# EAGLE board Pinscape Pico Expansion Board - DIY Friendly Main - SMD Sockets (EAGLE 7.7.0)
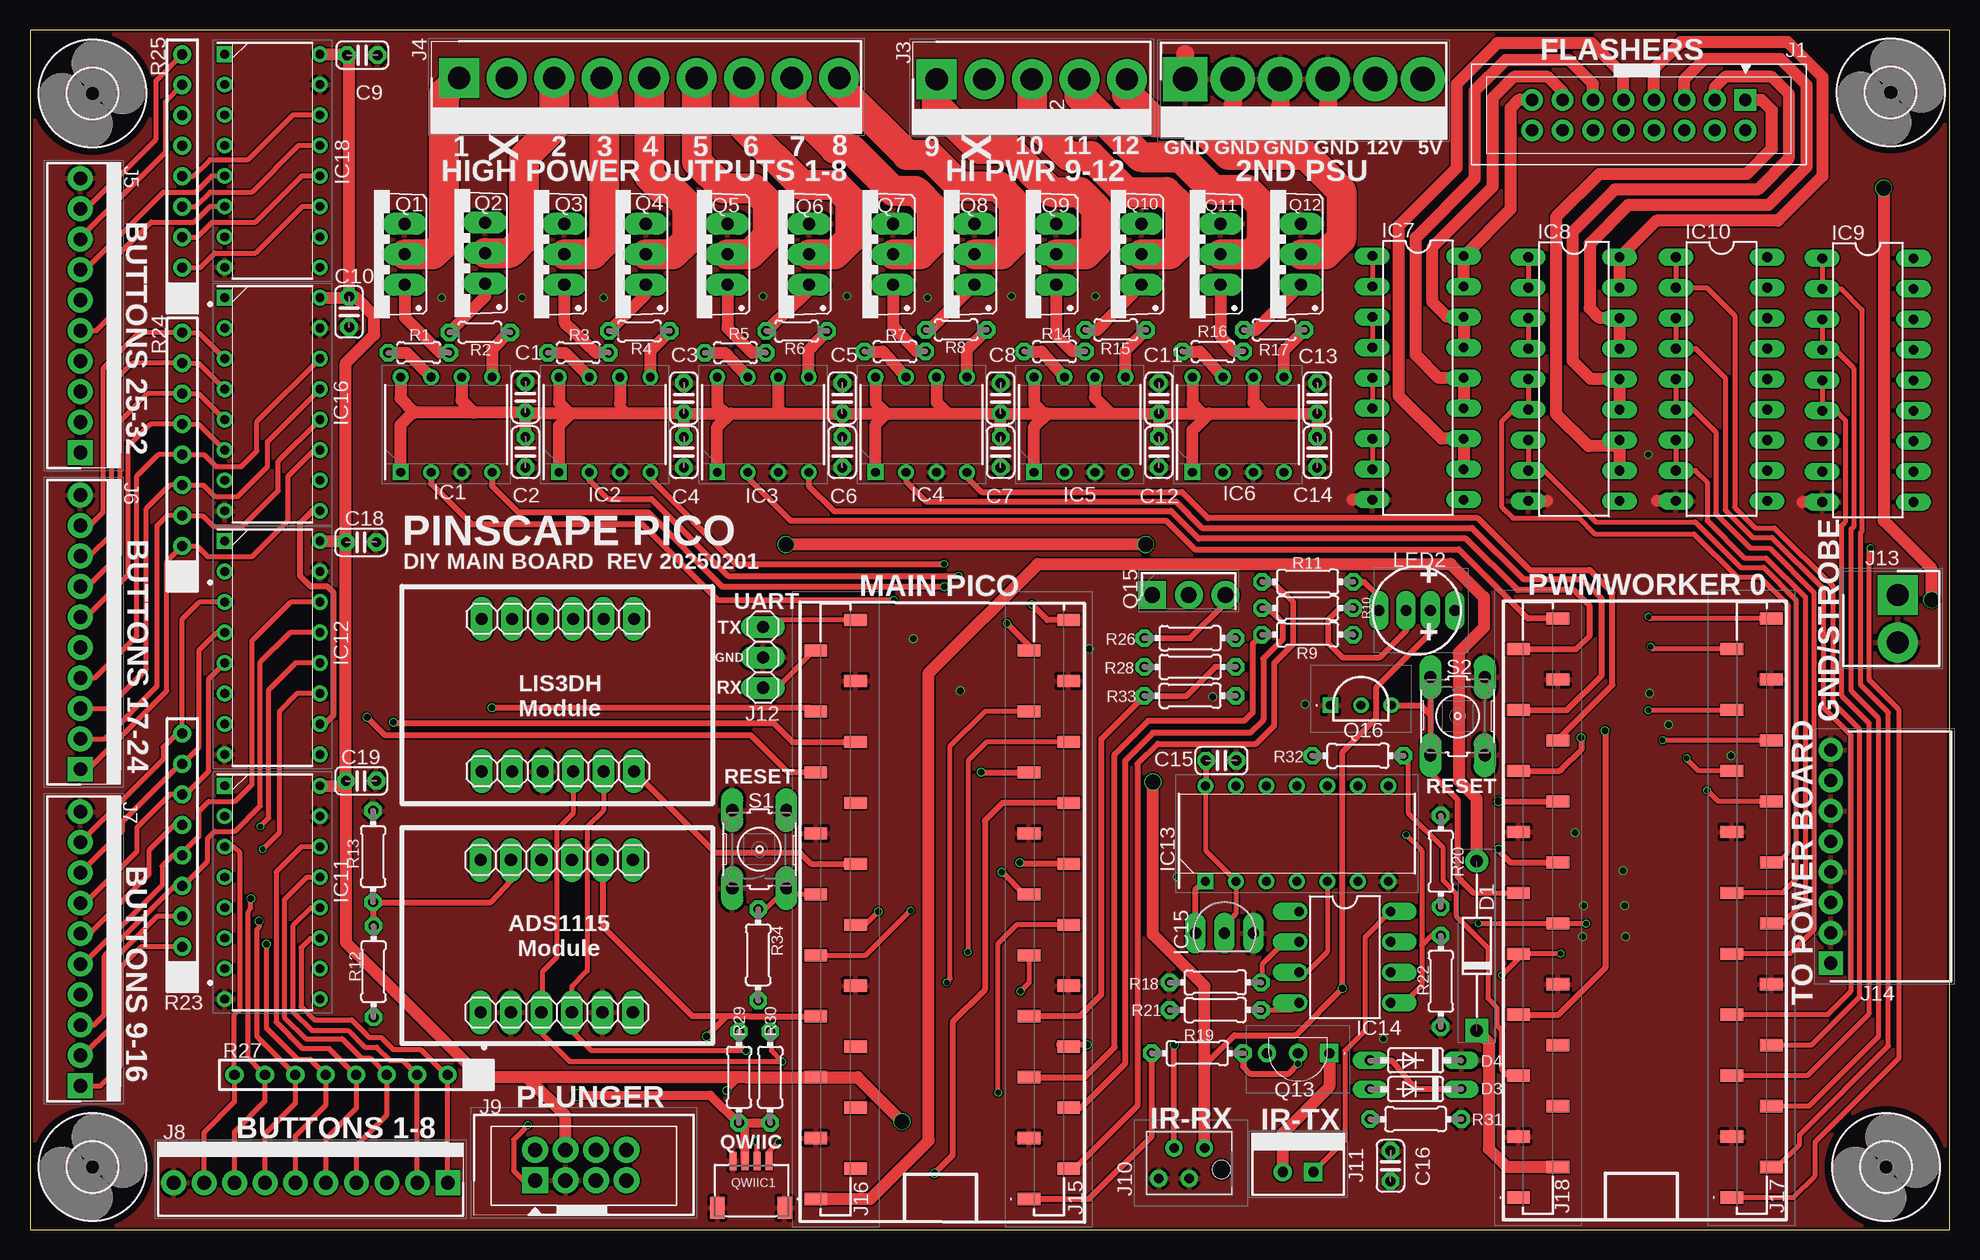
[diagram p0: board, top side]
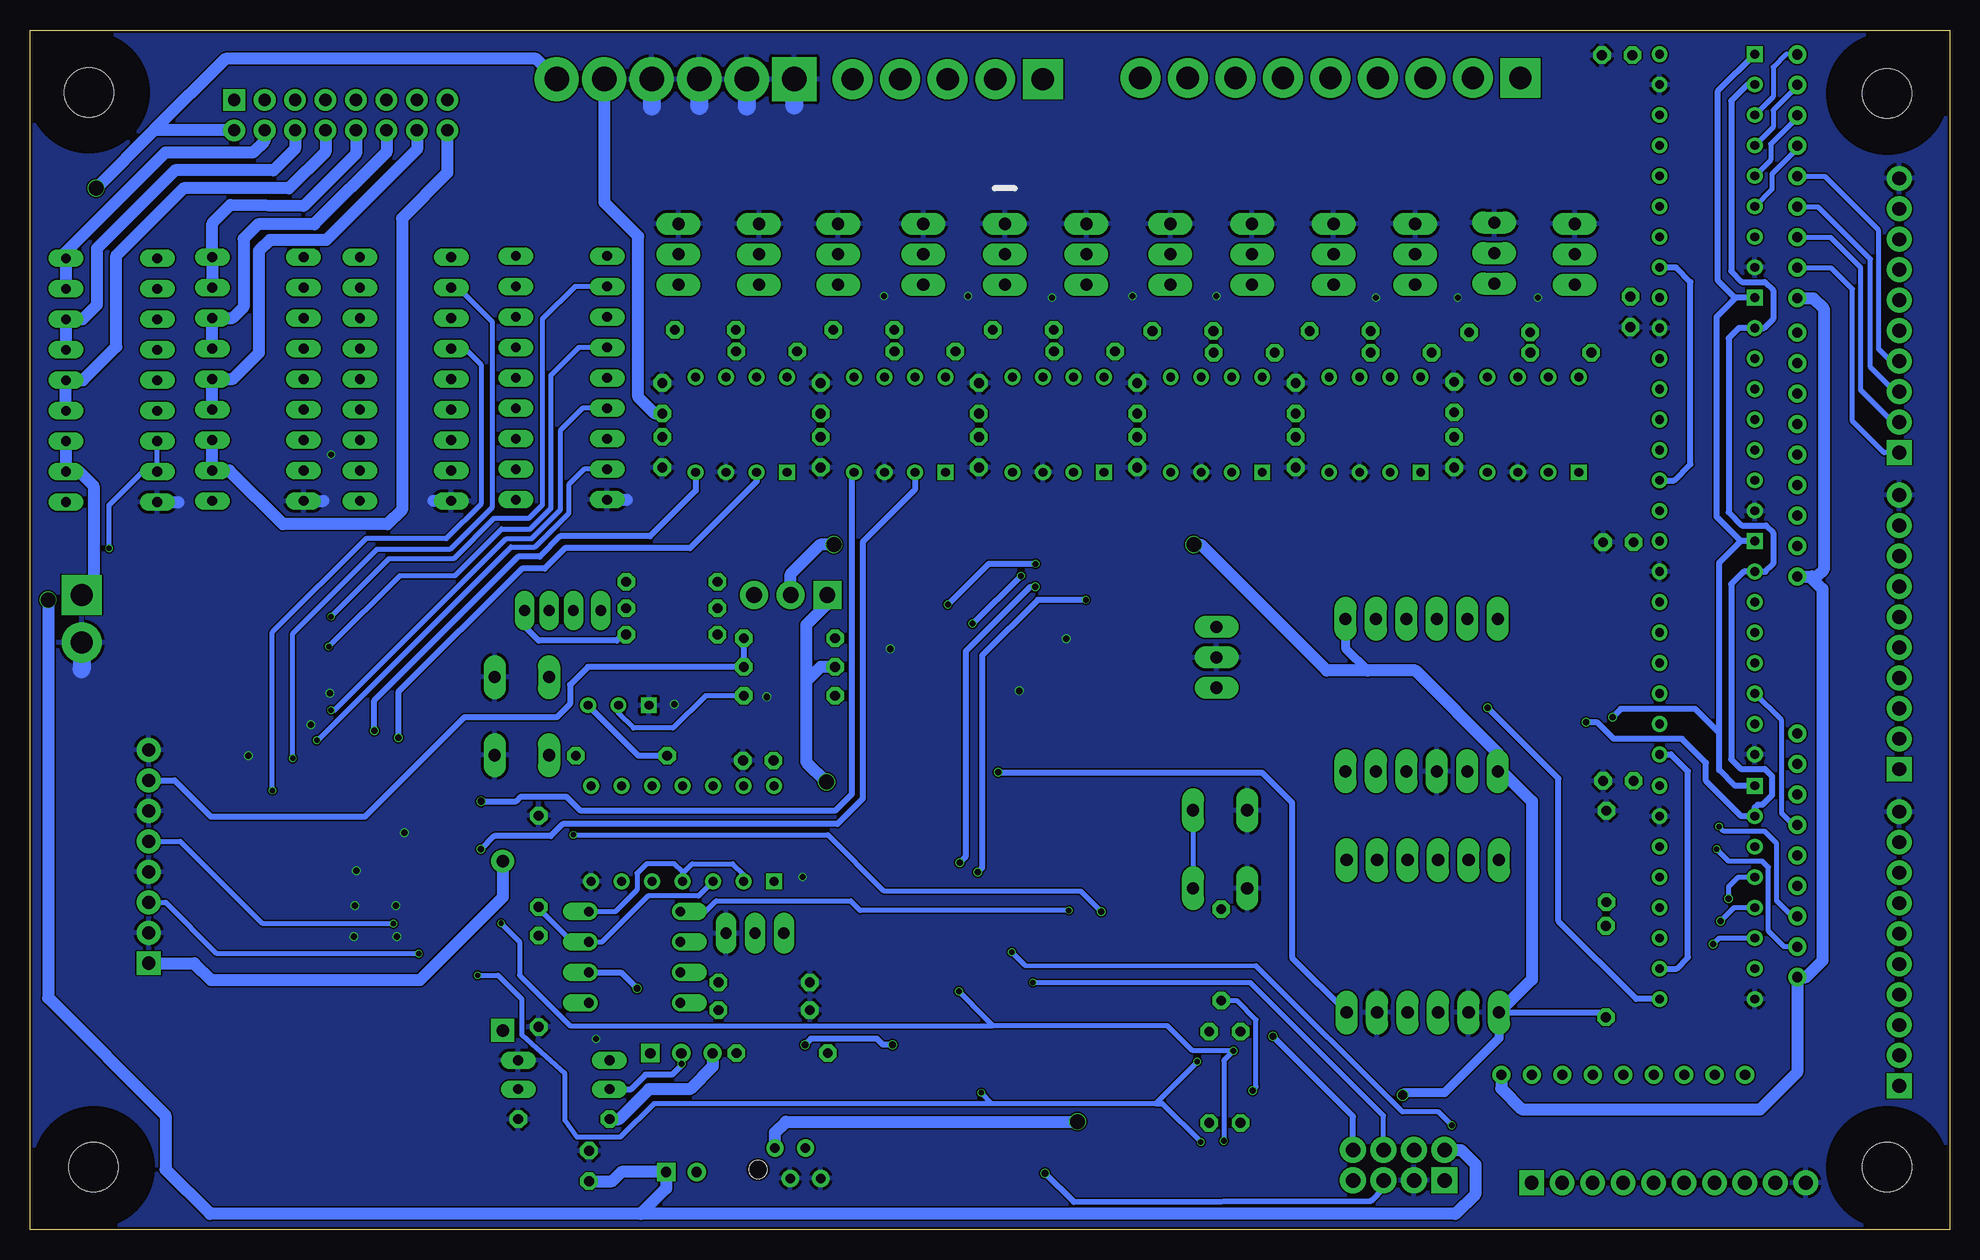
[diagram p1: board, bottom side, seen from below]

Size 160 x 100 mm. Coordinates in mm from the lower left corner, seen from the top.
Outline: 0,0 160,0 160,100 0,100 0,0
Copper layers (1*16): Top 0.035mm / dielectric 1.6mm / Bottom 0.035mm
Design rules "jlcpcb-2layers": minimum track width 5mil, minimum drill 0.3mm, track to track 5mil, track to pad 5mil, pad to pad 5mil, via to via 5mil, smd to smd 5mil, copper to edge 0.2mm, drill to drill 6mil, minimum pad ring 10mil, minimum via ring 3mil, stop-mask expansion 4mil, vias tented up to drill 0mil, thermal gap 10mil
Net classes: 1 highpower: width 0.305 mm, drill 0.483 mm

## Footprints (pad centres in the part's own frame; a part is rotated, then mirrored left to right if it is on the bottom)
C025-024X044 = drill 0.813 octagon: 1 -1.27,0; 2 1.27,0
DIOAD1408W86L464D236 = drill 1.05 pad 1.575 square: 1 0,0 | drill 1.05 pad 1.575: 2 14.1,0
DO35-7 = drill 0.813 long: A 3.81,0; C -3.81,0
DIP794W53P254L959H508Q8N = drill 0.73 pad 1.13 square: 1 -3.97,3.81 | drill 0.73 pad 1.13: 2 -3.97,1.27; 3 -3.97,-1.27; 4 -3.97,-3.81; 5 3.97,-3.81; 6 3.97,-1.27; 7 3.97,1.27; 8 3.97,3.81
DIL18 = drill 0.813 long: 1 -10.16,-3.81; 2 -7.62,-3.81; 3 -5.08,-3.81; 4 -2.54,-3.81; 5 0,-3.81; 6 2.54,-3.81; 7 5.08,-3.81; 8 7.62,-3.81; 9 10.16,-3.81; 10 10.16,3.81; 11 7.62,3.81; 12 5.08,3.81; 13 2.54,3.81; 14 0,3.81; 15 -2.54,3.81; 16 -5.08,3.81; 17 -7.62,3.81; 18 -10.16,3.81
DIP794W53P254L1930H508Q16N = drill 0.73 pad 1.13 square: 1 -3.97,8.89 | drill 0.73 pad 1.13: 2 -3.97,6.35; 3 -3.97,3.81; 4 -3.97,1.27; 5 -3.97,-1.27; 6 -3.97,-3.81; 7 -3.97,-6.35; 8 -3.97,-8.89; 9 3.97,-8.89; 10 3.97,-6.35; 11 3.97,-3.81; 12 3.97,-1.27; 13 3.97,1.27; 14 3.97,3.81; 15 3.97,6.35; 16 3.97,8.89
DIP794W53P254L1930H508Q14N = drill 0.73 pad 1.13 square: 1 -3.97,7.62 | drill 0.73 pad 1.13: 2 -3.97,5.08; 3 -3.97,2.54; 4 -3.97,0; 5 -3.97,-2.54; 6 -3.97,-5.08; 7 -3.97,-7.62; 8 3.97,-7.62; 9 3.97,-5.08; 10 3.97,-2.54; 11 3.97,0; 12 3.97,2.54; 13 3.97,5.08; 14 3.97,7.62
DIL08 = drill 0.813 offset: 1 -3.81,-3.81; 2 -1.27,-3.81; 3 1.27,-3.81; 4 3.81,-3.81; 5 3.81,3.81; 6 1.27,3.81; 7 -1.27,3.81; 8 -3.81,3.81
TO-92_(TO-226) = drill 0.94 pad 1.118 long: 1 1.143,0; 2 -1.27,0; 3 -3.683,0
3M-30316-6002HB = drill 1.01 pad 1.51 square: 1 -8.89,-1.27 | drill 1.01 pad 1.51: 2 -8.89,1.27; 3 -6.35,-1.27; 4 -6.35,1.27; 5 -3.81,-1.27; 6 -3.81,1.27; 7 -1.27,-1.27; 8 -1.27,1.27; 9 1.27,-1.27; 10 1.27,1.27; 11 3.81,-1.27; 12 3.81,1.27; 13 6.35,-1.27; 14 6.35,1.27; 15 8.89,-1.27; 16 8.89,1.27
SHDR6W183P0X396_1X6_2377X762X1 = drill 2.05 pad 3.075 square: 1 0,0 | drill 2.05 pad 3.075: 2 3.96,0; 3 7.92,0; 4 11.88,0; 5 15.84,0; 6 19.8,0
HDRV5W117P0X396_1X5_1981X762X1 = drill 1.85 pad 2.775 square: 1 7.92,0 | drill 1.85 pad 2.775: 2 3.958,0; 3 -0.004,0; 4 -3.966,0; 5 -7.928,0
SHDR9W117P0X396_1X9_3566X762X1 = drill 1.85 pad 2.775 square: 1 15.84,0 | drill 1.85 pad 2.775: 2 11.878,0; 3 7.916,0; 4 3.954,0; 5 -0.008,0; 6 -3.97,0; 7 -7.932,0; 8 -11.894,0; 9 -15.856,0
SHDR10W66P0X254_1X10_2540X572X = drill 1.15 pad 1.725 square: 1 11.43,0 | drill 1.15 pad 1.725: 2 8.89,0; 3 6.35,0; 4 3.81,0; 5 1.27,0; 6 -1.27,0; 7 -3.81,0; 8 -6.35,0; 9 -8.89,0; 10 -11.43,0
SHDR8W69P254_2X4_1780X878X955P = drill 1.2 pad 1.8 square: 1 0,0 | drill 1.2 pad 1.8: 2 0,2.54; 3 2.54,0; 4 2.54,2.54; 5 5.08,0; 6 5.08,2.54; 7 7.62,0; 8 7.62,2.54
2150794 = drill 0.8 pad 1.3: 1 0,0; 2 -1.27,-2.54; 3 -2.54,0; 4 -3.81,-2.54 | hole 1.5: 1.4,-1.8
HDRV2W66P0X254_1X2_762X572X100 = drill 0.85 pad 1.275 square: 1 1.27,0 | drill 0.85 pad 1.275: 2 -1.27,0
1X03 = drill 1.016 long: 1 -2.54,0; 2 0,0; 3 2.54,0
SHDR2W117P0X396_1X2_792X762X11 = drill 1.85 pad 2.775 square: 1 0,0 | drill 1.85 pad 2.775: 2 3.962,0
RHDRRA8W64P254_1X8_2083X851X24 = drill 1.1 pad 1.65 square: 1 0,0 | drill 1.1 pad 1.65: 2 -2.54,0; 3 -5.08,0; 4 -7.62,0; 5 -10.16,0; 6 -12.7,0; 7 -15.24,0; 8 -17.78,0
M20-7862042-B = smd 1.02 x 1.9: 1 -24.13,1.65; 2 -21.59,-1.65; 3 -19.05,1.65; 4 -16.51,-1.65; 5 -13.97,1.65; 6 -11.43,-1.65; 7 -8.89,1.65; 8 -6.35,-1.65; 9 -3.81,1.65; 10 -1.27,-1.65; 11 1.27,1.65; 12 3.81,-1.65; 13 6.35,1.65; 14 8.89,-1.65; 15 11.43,1.65; 16 13.97,-1.65; 17 16.51,1.65; 18 19.05,-1.65; 19 21.59,1.65; 20 24.13,-1.65
1X06 = drill 1.016 long: 1 -6.35,0; 2 -3.81,0; 3 -1.27,0; 4 1.27,0; 5 3.81,0; 6 6.35,0
5218559F = drill 0.91 pad 1.016 long: 1 0,1.27; 2 0,-0.762; 3 0,-2.794; 4 0,-5.08
TO220BV = drill 1.016 long: 1 -2.54,-2.54; 2 0,-2.54; 3 2.54,-2.54
BC33725 = drill 0.85 pad 1.381 square: 1 0,0 | drill 0.85 pad 1.381: 2 2.6,0; 3 5.2,0
TO229P300X760X1364-3P = drill 1.3 pad 1.95 square: 1 -0.762,0 | drill 1.3 pad 1.95: 2 2.29,0; 3 5.342,0
2N2222A = drill 0.72 pad 1.234 square: 1 0,0 | drill 0.72 pad 1.234: 2 2.54,0; 3 5.08,0
JST_SH4 = smd 0.6 x 1.55: 1 -1.5,2.514; 2 -0.5,2.514; 3 0.5,2.514; 4 1.5,2.514 | smd 1.2 x 1.8: MT1 -2.8,-1.386; MT2 2.8,-1.386
0204/5 = drill 0.813 pad 1.333 octagon: 1 -2.54,0; 2 2.54,0
0204/7 = drill 0.813 octagon: 1 -3.81,0; 2 3.81,0
4609X = drill 0.84 pad 1.34: 1 -10.16,0; 2 -7.62,0; 3 -5.08,0; 4 -2.54,0; 5 0,0; 6 2.54,0; 7 5.08,0; 8 7.62,0; 9 10.16,0
B3F-10XX = drill 1.016 long: 1 -3.251,2.261; 2 3.251,2.261; 3 -3.251,-2.261; 4 3.251,-2.261
4,1 = hole 4.1: 0,0

## Placement (x,y rotation side)
C1  100nF  [C025-024X044]  41.3,69.4 270 top
C2  4.7uF  [C025-024X044]  41.3,64.8 90 top
C3  100nF  [C025-024X044]  54.5,69.3 270 top
C4  4.7uF  [C025-024X044]  54.5,64.8 90 top
C5  100nF  [C025-024X044]  67.7,69.3 270 top
C6  4.7uF  [C025-024X044]  67.7,64.8 90 top
C7  100nF  [C025-024X044]  80.9,64.8 90 top
C8  4.7uF  [C025-024X044]  80.9,69.3 270 top
C9  100nF  [C025-024X044]  27.7,97.9 180 top
C10  100nF  [C025-024X044]  26.6,76.5 90 top
C11  100nF  [C025-024X044]  94.1,69.3 270 top
C12  4.7uF  [C025-024X044]  94.1,64.8 90 top
C13  100nF  [C025-024X044]  107.3,69.3 270 top
C14  4.7uF  [C025-024X044]  107.3,64.8 90 top
C15  100nF  [C025-024X044]  99.3,39.1 0 top
C16  4.7uF  [C025-024X044]  113.4,5.3 90 top
C18  100nF  [C025-024X044]  27.6,57.3 180 top
C19  100nF  [C025-024X044]  27.6,37.4 180 top
D1  SB140-T  [DIOAD1408W86L464D236]  120.6,16.6 90 top
D3  1N4148  [DO35-7]  115.5,11.7 180 top
D4  1N4148  [DO35-7]  115.5,14.1 180 top
IC1  UCC27524P  [DIP794W53P254L959H508Q8N]  34.7,67.1 90 top
IC2  UCC27524P  [DIP794W53P254L959H508Q8N]  47.9,67.1 90 top
IC3  UCC27524P  [DIP794W53P254L959H508Q8N]  61.1,67.1 90 top
IC4  UCC27524P  [DIP794W53P254L959H508Q8N]  74.3,67.1 90 top
IC5  UCC27524P  [DIP794W53P254L959H508Q8N]  87.5,67.1 90 top
IC6  UCC27524P  [DIP794W53P254L959H508Q8N]  100.7,67.1 90 top
IC7  ULN2803A  [DIL18]  115.7,71 270 top
IC8  ULN2803A  [DIL18]  128.7,70.9 270 top
IC9  ULN2803A  [DIL18]  153.2,70.8 270 top
IC10  ULN2803A  [DIL18]  141,70.9 270 top
IC11  SN74HC165N  [DIP794W53P254L1930H508Q16N]  20.2,28.1 0 top
IC12  SN74HC165N  [DIP794W53P254L1930H508Q16N]  20.2,48.5 0 top
IC13  SN74HC74NE4  [DIP794W53P254L1930H508Q14N]  105.6,33 90 top
IC14  PC827  [DIL08]  109.6,22.7 270 top
IC15  S-80833CLY  [TO-92_(TO-226)]  98.3,24.7 180 top
IC16  SN74HC165N  [DIP794W53P254L1930H508Q16N]  20.2,68.8 0 top
IC18  SN74HC165N  [DIP794W53P254L1930H508Q16N]  20.2,89.1 0 top
J1  30316-6002HB  [3M-30316-6002HB]  134.1,92.9 180 top
J2  640445-6  [SHDR6W183P0X396_1X6_2377X762X1]  96.3,95.9 0 top
J3  640445-5  [HDRV5W117P0X396_1X5_1981X762X1]  83.5,95.9 180 top
J4  640445-9  [SHDR9W117P0X396_1X9_3566X762X1]  51.6,96 180 top
J5  1-640456-0  [SHDR10W66P0X254_1X10_2540X572X]  4.2,76.2 270 top
J6  1-640456-0  [SHDR10W66P0X254_1X10_2540X572X]  4.2,49.8 270 top
J7  1-640456-0  [SHDR10W66P0X254_1X10_2540X572X]  4.2,23.4 270 top
J8  1-640456-0  [SHDR10W66P0X254_1X10_2540X572X]  23.4,3.9 0 top
J9  30308-6002HB  [SHDR8W69P254_2X4_1780X878X955P]  42.1,4.1 0 top
J10  215079-4  [2150794]  97.9,6.8 0 top
J11  640454-2  [HDRV2W66P0X254_1X2_762X572X100]  105.7,4.8 0 top
J12  [1X03]  61.1,47.7 270 top
J13  640445-2  [SHDR2W117P0X396_1X2_792X762X11]  155.7,52.9 270 top
J14  SSQ-108-02-T-S-RA  [RHDRRA8W64P254_1X8_2083X851X24]  150.1,22.2 270 top
J15  M20-7862042B  [M20-7862042-B]  84.92,26.68 90 top
J16  M20-7862042B  [M20-7862042-B]  67.15,26.68 90 top
J17  M20-7862042B  [M20-7862042-B]  143.5,26.8 90 top
J18  M20-7862042B  [M20-7862042-B]  125.7,26.8 90 top
JP1  [1X06]  44,50.9 0 top
JP2  [1X06]  44,38.2 0 top
JP3  [1X06]  43.9,30.8 0 top
JP4  [1X06]  43.9,18.1 0 top
LED2  521-8559F  [5218559F]  117.5,51.6 270 top
Q1  FDPF085N10A  [TO220BV]  28.7,81.3 90 top
Q2  FDPF085N10A  [TO220BV]  35.4,81.4 90 top
Q3  FDPF085N10A  [TO220BV]  42,81.3 90 top
Q4  FDPF085N10A  [TO220BV]  48.8,81.3 90 top
Q5  FDPF085N10A  [TO220BV]  55.6,81.3 90 top
Q6  FDPF085N10A  [TO220BV]  62.4,81.3 90 top
Q7  FDPF085N10A  [TO220BV]  69.4,81.3 90 top
Q8  FDPF085N10A  [TO220BV]  76.2,81.3 90 top
Q9  FDPF085N10A  [TO220BV]  83,81.3 90 top
Q10  FDPF085N10A  [TO220BV]  90.1,81.3 90 top
Q11  FDPF085N10A  [TO220BV]  96.7,81.3 90 top
Q12  FDPF085N10A  [TO220BV]  103.4,81.3 90 top
Q13  BC337-25  [BC33725]  108.3,14.7 180 top
Q15  2N5195G  [TO229P300X760X1364-3P]  94.3,52.9 0 top
Q16  2N2222A  [2N2222A]  108.4,43.7 0 top
QWIIC1  QWIIC  [JST_SH4]  60.1,3.2 0 top
R1  4R7  [0204/5]  32.4,73.1 0 top
R2  4R7  [0204/5]  37.5,74.8 180 top
R3  4R7  [0204/5]  45.7,73.1 0 top
R4  4R7  [0204/5]  50.8,74.9 180 top
R5  4R7  [0204/5]  58.8,73.1 0 top
R6  4R7  [0204/5]  63.9,74.9 180 top
R7  4R7  [0204/5]  72.1,73.2 0 top
R8  4R7  [0204/5]  77.2,75 180 top
R9  100R  [0204/7]  106.5,49.6 0 top
R10  10R  [0204/7]  106.5,51.8 0 top
R11  10R  [0204/7]  106.5,54 0 top
R12  10K  [0204/7]  28.64,21.5 270 top
R13  10K  [0204/7]  28.6,31.1 270 top
R14  4R7  [0204/5]  85.4,73.2 0 top
R15  4R7  [0204/5]  90.5,75 180 top
R16  4R7  [0204/5]  98.6,73.2 0 top
R17  4R7  [0204/5]  103.7,75 180 top
R18  240R  [0204/7]  98.8,20.6 0 top
R19  1.8K  [0204/7]  97.3,14.7 0 top
R20  10K  [0204/7]  117.6,30.7 90 top
R21  360R  [0204/7]  98.8,18.3 0 top
R22  10K  [0204/7]  117.6,20.7 90 top
R23  4609X-101-103F  [4609X]  12.7,31.2 90 top
R24  4609X-101-103F  [4609X]  12.7,64.6 90 top
R25  4609X-101-103F  [4609X]  12.7,87.8 90 top
R26  1K  [0204/7]  96.7,49.3 180 top
R27  4609X-101-103F  [4609X]  27.2,12.9 180 top
R28  22K  [0204/7]  96.7,46.9 180 top
R29  15K  [0204/7]  59.1,12.7 270 top
R30  15K  [0204/7]  61.7,12.7 270 top
R31  2R5  [0204/7]  115.5,9.2 180 top
R32  4.7K  [0204/7]  110.7,39.5 0 top
R33  2.2k  [0204/7]  96.7,44.5 0 top
R34  4.7K  [0204/7]  60.7,22.9 270 top
S1  [B3F-10XX]  60.8,31.7 90 top
S2  [B3F-10XX]  119,42.8 270 top
U$1  [4,1]  5.2,94.7 0 top
U$2  [4,1]  155.1,94.8 0 top
U$3  [4,1]  154.7,5.2 0 top
U$4  [4,1]  5.2,5.2 0 top

## Library data of the parts
C1 C3 C5 C7 C9-C11 C13 C15 C18 C19 = rcl; PARTNO: 21RZ310-RC
C2 C4 C6 C8 C12 C14 C16 = rcl; PARTNO: 810-FG14X5R1H475KRT0
D1 = SamacSys_Parts; DESCRIPTION: Schottky Diodes & Rectifiers 1.0A 40V; HEIGHT: mm; MANUFACTURER_NAME: Diodes Incorporated; MANUFACTURER_PART_NUMBER: SB140-T; MOUSER_PART_NUMBER: 621-SB140-T; MOUSER_PRICE-STOCK: https://www.mouser.co.uk/ProductDetail/Diodes-Incorporated/SB140-T?qs=sxN%252BoM2fis8H2rSIUCd%252Bfg%3D%3D
D3 D4 = diode
IC1-IC6 = SamacSys_Parts; DESCRIPTION: Dual, 5A, High-Speed Low-Side Power MOSFET Driver; HEIGHT: 5.08mm; MANUFACTURER_NAME: Texas Instruments; MANUFACTURER_PART_NUMBER: UCC27524P; MOUSER_PART_NUMBER: 595-UCC27524P; MOUSER_PRICE-STOCK: https://www.mouser.co.uk/ProductDetail/Texas-Instruments/UCC27524P?qs=iuXUNOC6nYeLYu3RiGlNsQ%3D%3D
IC7-IC10 = uln-udn
IC11 IC12 IC16 IC18 = SamacSys_Parts; DESCRIPTION: 8-BIT PARALLEL-LOAD SHIFT REGISTERS; HEIGHT: 5.08mm; MANUFACTURER_NAME: Texas Instruments; MANUFACTURER_PART_NUMBER: SN74HC165N; MOUSER_PART_NUMBER: 595-SN74HC165N; MOUSER_PRICE-STOCK: https://www.mouser.co.uk/ProductDetail/Texas-Instruments/SN74HC165N?qs=bvpNxolhIUPhyI98TAZx%2Fg%3D%3D
IC13 = SamacSys_Parts; DESCRIPTION: Flip Flop D-Type Pos-Edge 2-Element 14-Pin PDIP Tube; HEIGHT: 5.08mm; MANUFACTURER_NAME: Texas Instruments; MANUFACTURER_PART_NUMBER: SN74HC74NE4; MOUSER_PART_NUMBER: 595-SN74HC74NE4; MOUSER_PRICE-STOCK: https://www.mouser.co.uk/ProductDetail/Texas-Instruments/SN74HC74NE4?qs=AgY10sKTvDKeNkeCRvMUaQ%3D%3D
IC14 = optocoupler; OC_FARNELL: unknown; OC_NEWARK: unknown
IC15 J15-J18 = SamacSys_Parts
J1 = SamacSys_Parts; DESCRIPTION: Low Profile Header; HEIGHT: mm; MANUFACTURER_NAME: 3M; MANUFACTURER_PART_NUMBER: 30316-6002HB; MOUSER_PART_NUMBER: 517-30316-6002; MOUSER_PRICE-STOCK: https://www.mouser.co.uk/ProductDetail/3M-Electronic-Solutions-Division/30316-6002HB?qs=QV10cN0MjFtE79zTqp0XZw%3D%3D
J2 = SamacSys_Parts; DESCRIPTION: 6 way friction lock header,3.96mm pitch; HEIGHT: 11.049mm; MANUFACTURER_NAME: TE Connectivity; MANUFACTURER_PART_NUMBER: 640445-6; MOUSER_PART_NUMBER: 571-6404456; MOUSER_PRICE-STOCK: https://www.mouser.com/Search/Refine.aspx?Keyword=571-6404456
J3 = SamacSys_Parts; DESCRIPTION: Headers & Wire Housings FRCTN LK HDR STR 5P Square post tin; HEIGHT: 13.716mm; MANUFACTURER_NAME: TE Connectivity; MANUFACTURER_PART_NUMBER: 640445-5; MOUSER_PART_NUMBER: 571-640445-5; MOUSER_PRICE-STOCK: https://www.mouser.co.uk/ProductDetail/TE-Connectivity/640445-5?qs=P8zzrVhehateG3JS5ZzrEg%3D%3D
J4 = SamacSys_Parts; DESCRIPTION: Header,MTA156,straight,3.96mm,9way; HEIGHT: 13.716mm; MANUFACTURER_NAME: TE Connectivity; MANUFACTURER_PART_NUMBER: 640445-9; MOUSER_PART_NUMBER: 571-6404459; MOUSER_PRICE-STOCK: https://www.mouser.co.uk/ProductDetail/TE-Connectivity/640445-9?qs=P8zzrVhehauUywCYO3wBKg%3D%3D
J5-J8 = SamacSys_Parts; DESCRIPTION: 10 way MTA straight friction lock header; HEIGHT: 10.414mm; MANUFACTURER_NAME: TE Connectivity; MANUFACTURER_PART_NUMBER: 1-640456-0; MOUSER_PART_NUMBER: 571-16404560; MOUSER_PRICE-STOCK: https://www.mouser.co.uk/ProductDetail/TE-Connectivity-AMP/1-640456-0?qs=%2F35zJ5USjomFMMbv03PGrg%3D%3D
J9 = SamacSys_Parts; DESCRIPTION: Headers & Wire Housings 8/HDR/LP/ BX/STR/CS/.110/AU FL; HEIGHT: 9.554mm; MANUFACTURER_NAME: 3M; MANUFACTURER_PART_NUMBER: 30308-6002HB
J10 = SamacSys_Parts; DESCRIPTION: Connector,F-o-B,PCB,Micro-MaTch,4W,top; HEIGHT: 4.2mm; MANUFACTURER_NAME: TE Connectivity; MANUFACTURER_PART_NUMBER: 215079-4; MOUSER_PART_NUMBER: 571-215079-4; MOUSER_PRICE-STOCK: https://www.mouser.co.uk/ProductDetail/TE-Connectivity/215079-4?qs=O3N86PA0UL%252BdoZEVcFx8sQ%3D%3D
J11 = SamacSys_Parts; DESCRIPTION: 2 way MTA straight polarised header TE Connectivity MTA-100 Series, 2.54mm Pitch 2 Way 1 Row Straight PCB Header, Solder Termination, 5A; HEIGHT: 10.03mm; MANUFACTURER_NAME: TE Connectivity; MANUFACTURER_PART_NUMBER: 640454-2; MOUSER_PART_NUMBER: 571-640454-2; MOUSER_PRICE-STOCK: https://www.mouser.co.uk/ProductDetail/TE-Connectivity/640454-2?qs=%2F35zJ5USjomXuMPFoVTCPQ%3D%3D
J12 JP1-JP4 = pinhead
J13 = SamacSys_Parts; DESCRIPTION: 2 way friction lock header,3.96mm pitch TE Connectivity MTA-156 Series, 3.96mm Pitch 2 Way 1 Row Straight PCB Header, Through Hole, Solder Termination; HEIGHT: 11.049mm; MANUFACTURER_NAME: TE Connectivity; MANUFACTURER_PART_NUMBER: 640445-2; MOUSER_PART_NUMBER: 5716404452; MOUSER_PRICE-STOCK: https://www.mouser.co.uk/ProductDetail/TE-Connectivity-AMP/640445-2?qs=P8zzrVhehau7EdfErby3cQ%3D%3D
J14 = SamacSys_Parts; DESCRIPTION: SOCKET STRIP,2.54mm,Single Row,8 Pos; HEIGHT: 2.41mm; MANUFACTURER_NAME: SAMTEC; MANUFACTURER_PART_NUMBER: SSQ-108-02-T-S-RA; MOUSER_PART_NUMBER: 200-SSQ10802TSRA; MOUSER_PRICE-STOCK: https://www.mouser.co.uk/ProductDetail/Samtec/SSQ-108-02-T-S-RA?qs=rU5fayqh%252BE2lKv1YfhSTPw%3D%3D
LED2 = SamacSys_Parts; DESCRIPTION: Standard LEDs - Through Hole 5mm RGB WC LED w4 leads; HEIGHT: 8.6mm; MANUFACTURER_NAME: Dialight; MANUFACTURER_PART_NUMBER: 521-8559F; MOUSER_PART_NUMBER: 645-5218559F; MOUSER_PRICE-STOCK: https://www.mouser.co.uk/ProductDetail/Dialight/521-8559F?qs=vmHwEFxEFR%2FyCJVY9sdZTA%3D%3D
Q1-Q12 = BUK7575; PARTNO: FDPF085N10A
Q13 = SamacSys_Parts; DESCRIPTION: Trans GP BJT NPN 45V 0.8A 625mW 3-Pin TO-92 Ammo; HEIGHT: 5.33mm; MANUFACTURER_NAME: Diotec; MANUFACTURER_PART_NUMBER: BC337-25; MOUSER_PART_NUMBER: 637-BC337-25; MOUSER_PRICE-STOCK: https://www.mouser.co.uk/ProductDetail/Diotec-Semiconductor/BC337-25?qs=OlC7AqGiEDnYgKdQ87b9GA%3D%3D
Q15 = SamacSys_Parts; DESCRIPTION: ON SEMICONDUCTOR - 2N5195G - Bipolar (BJT) Single Transistor, General Purpose, PNP, -80 V, 2 MHz, 40 W, -4 A, 80 hFE; HEIGHT: 3mm; MANUFACTURER_NAME: onsemi; MANUFACTURER_PART_NUMBER: 2N5195G; MOUSER_PART_NUMBER: 863-2N5195G; MOUSER_PRICE-STOCK: https://www.mouser.co.uk/ProductDetail/ON-Semiconductor/2N5195G?qs=vLkC5FC1VN%252B%2FeNbeVgxufg%3D%3D
Q16 = SamacSys_Parts; DESCRIPTION: NPN General purpose transistor . IC 150 mA . f 100 MHz; HEIGHT: 7.5mm; MANUFACTURER_NAME: Diotec; MANUFACTURER_PART_NUMBER: 2N2222A; MOUSER_PART_NUMBER: 637-2N2222A; MOUSER_PRICE-STOCK: https://www.mouser.co.uk/ProductDetail/Diotec-Semiconductor/2N2222A?qs=OlC7AqGiEDmNlRSTGL2dYg%3D%3D
QWIIC1 = microbuilder
R1-R22 R26 R28-R34 = resistor; PARTNO: 660-MFS1/4DCT52R47R0
R23-R25 R27 = SamacSys_Parts - backup; DESCRIPTION: Bourns 4600X Series 1.2k Bussed Resistor Network, 8 Resistors, 1.13W total SIP Package Pin; HEIGHT: mm; MANUFACTURER_NAME: Bourns; MANUFACTURER_PART_NUMBER: 4609X-101-122LF; MOUSER_PART_NUMBER: 652-4609X-1LF-1.2K; MOUSER_PRICE-STOCK: https://www.mouser.co.uk/ProductDetail/Bourns/4609X-101-122LF?qs=XW6UEr546KJvfpyYRaJ6yw%3D%3D
S1 S2 = switch-omron; MPN: B3F-1000; OC_FARNELL: 176432; OC_NEWARK: 36M3542
U$1-U$4 = holes

## Nets
3V3_PERIPHERAL: JP1.6 JP2.1 JP4.1 Q15.2 QWIIC1.2 R12.2 R29.2 R30.2
3V3_PICO: C9.2 C10.2 C18.2 C19.2 IC11.16 IC12.16 IC14.6 IC16.16 IC18.16 J9.4 J10.1 J16.5 LED2.2 Q15.1 R23.1 R24.1 R25.1 R27.1 R28.2 R34.2
5V: C15.1 C16.1 IC13.2 IC13.4 IC13.14 IC14.8 IC15.2 J1.2 J2.6 J9.2 J11.1
12V: C1.2 C2.2 C3.2 C4.2 C5.2 C6.2 C7.2 C8.2 C11.2 C12.2 C13.2 C14.2 IC1.1 IC1.6 IC1.8 IC2.1 IC2.6 IC2.8 IC3.1 IC3.6 IC3.8 IC4.1 IC4.6 IC4.8 IC5.1 IC5.6 IC5.8 IC6.1 IC6.6 IC6.8 J2.5
$N377: D3.A Q13.2 R19.2
/PERIPHERAL_POWER_ENABLE: J14.7 J15.7 R26.1 R28.1 R33.1
ACCEL_INTR: J16.12 JP2.6
ADC_INTR: J15.15 JP4.6
BUTTON1: IC11.11 J8.1 R27.2
BUTTON2: IC11.12 J8.2 R27.3
BUTTON3: IC11.13 J8.4 R27.4
BUTTON4: IC11.14 J8.5 R27.5
BUTTON5: IC11.6 J8.6 R27.6
BUTTON6: IC11.5 J8.7 R27.7
BUTTON7: IC11.4 J8.8 R27.8
BUTTON8: IC11.3 J8.9 R27.9
BUTTON9: IC12.11 J7.1 R23.2
BUTTON10: IC12.12 J7.2 R23.3
BUTTON11: IC12.13 J7.3 R23.4
BUTTON12: IC12.14 J7.5 R23.5
BUTTON13: IC12.6 J7.6 R23.6
BUTTON14: IC12.5 J7.7 R23.7
BUTTON15: IC12.4 J7.8 R23.8
BUTTON16: IC12.3 J7.9 R23.9
BUTTON17: IC16.11 J6.1 R24.2
BUTTON18: IC16.12 J6.2 R24.3
BUTTON19: IC16.13 J6.3 R24.4
BUTTON20: IC16.14 J6.4 R24.5
BUTTON21: IC16.6 J6.6 R24.6
BUTTON22: IC16.5 J6.7 R24.7
BUTTON23: IC16.4 J6.8 R24.8
BUTTON24: IC16.3 J6.9 R24.9
BUTTON25: IC18.11 J5.1 R25.2
BUTTON26: IC18.12 J5.2 R25.3
BUTTON27: IC18.13 J5.3 R25.4
BUTTON28: IC18.14 J5.4 R25.5
BUTTON29: IC18.6 J5.5 R25.6
BUTTON30: IC18.5 J5.7 R25.7
BUTTON31: IC18.4 J5.8 R25.8
BUTTON32: IC18.3 J5.9 R25.9
BUTTON_CLK: IC11.2 IC12.2 IC16.2 IC18.2 J16.16
BUTTON_DATA: IC11.9 J16.17
BUTTON_SHLD: IC11.1 IC12.1 IC16.1 IC18.1 J16.15
FLASHCTL1: IC7.1 IC7.2 J17.20
FLASHCTL2: IC7.3 IC7.4 J17.19
FLASHCTL3: IC7.5 IC7.6 J17.17
FLASHCTL4: IC7.7 IC7.8 J17.16
FLASHCTL5: IC8.1 IC8.2 J17.15
FLASHCTL6: IC8.3 IC8.4 J17.14
FLASHCTL7: IC8.5 IC8.6 J17.12
FLASHCTL8: IC8.7 IC8.8 J17.11
FLASHCTL9: IC10.7 IC10.8 J17.10
FLASHCTL10: IC10.5 IC10.6 J17.9
FLASHCTL11: IC10.3 IC10.4 J17.7
FLASHCTL12: IC10.1 IC10.2 J17.6
FLASHCTL13: IC9.5 IC9.6 J17.5
FLASHCTL14: IC9.3 IC9.4 J17.4
FLASHCTL15: IC9.1 IC9.2 J17.2
FLASHCTL16: IC9.7 IC9.8 J17.1
FLASHER1: IC7.17 IC7.18 J1.15
FLASHER2: IC7.15 IC7.16 J1.13
FLASHER3: IC7.13 IC7.14 J1.11
FLASHER4: IC7.11 IC7.12 J1.9
FLASHER5: IC8.17 IC8.18 J1.7
FLASHER6: IC8.15 IC8.16 J1.5
FLASHER7: IC8.13 IC8.14 J1.3
FLASHER8: IC8.11 IC8.12 J1.1
FLASHER9: IC10.11 IC10.12 J1.16
FLASHER10: IC10.13 IC10.14 J1.14
FLASHER11: IC10.15 IC10.16 J1.12
FLASHER12: IC10.17 IC10.18 J1.10
FLASHER13: IC9.13 IC9.14 J1.8
FLASHER14: IC9.15 IC9.16 J1.6
FLASHER15: IC9.17 IC9.18 J1.4
FLASHER16: IC9.11 IC9.12 J13.1
GND: C1.1 C2.1 C3.1 C4.1 C5.1 C6.1 C7.1 C8.1 C9.1 C10.1 C11.1 C12.1 C13.1 C14.1 C15.2 C16.2 C18.1 C19.1 D4.C IC1.3 IC2.3 IC3.3 IC4.3 IC5.3 IC6.3 IC7.9 IC8.9 IC9.9 IC10.9 IC11.8 IC11.15 IC12.8 IC12.15 IC13.7 IC15.3 IC16.8 IC16.15 IC18.8 IC18.15 J2.1 J2.2 J2.3 J2.4 J5.10 J6.10 J7.10 J8.10 J9.3 J10.2 J10.4 J12.2 J13.2 J14.2 J14.4 J14.6 J14.8 J15.3 J15.8 J15.13 J15.18 J16.3 J16.8 J16.13 J16.18 J17.3 J17.8 J17.13 J17.18 J18.3 J18.8 J18.13 J18.18 JP2.3 JP4.2 JP4.5 Q1.3 Q2.3 Q3.3 Q4.3 Q5.3 Q6.3 Q7.3 Q8.3 Q9.3 Q10.3 Q11.3 Q12.3 Q16.1 QWIIC1.1 QWIIC1.MT1 QWIIC1.MT2 R13.1 R18.1 R20.2 R21.1 R22.1 R31.1 S1.1 S1.2 S2.1 S2.2
IR_IN: J10.3 J15.6
IR_LED_CATHODE: J11.2 Q13.1
IR_OUT: J15.1 R19.1
LED_B: J15.4 R10.1
LED_G: J15.2 R11.1
LED_R: J15.5 R9.1
N$1: IC1.7 R1.1
N$2: IC1.5 R2.1
N$3: Q1.1 R1.2
N$4: Q2.1 R2.2
N$5: IC2.7 R3.1
N$6: IC2.5 R4.1
N$7: Q3.1 R3.2
N$8: Q4.1 R4.2
N$9: IC3.7 R5.1
N$10: IC3.5 R6.1
N$11: Q5.1 R5.2
N$12: Q6.1 R6.2
N$13: IC4.7 R7.1
N$14: IC4.5 R8.1
N$15: Q7.1 R7.2
N$16: Q8.1 R8.2
N$17: D1.1 J18.2
N$18: LED2.1 R9.2
N$19: IC5.7 R14.1
N$20: IC5.5 R15.1
N$21: IC11.10 IC12.9
N$22: IC12.10 IC16.9
N$23: IC16.10 IC18.9
N$24: Q15.3 R26.2
N$25: Q9.1 R14.2
N$26: Q10.1 R15.2
N$27: IC6.7 R16.1
N$28: IC6.5 R17.1
N$29: Q11.1 R16.2
N$30: Q12.1 R17.2
N$31: Q16.2 R33.2
N$32: D3.C D4.A
N$33: Q13.3 R31.2
N$34: J18.5 R32.2
N$35: J18.11 Q16.3 R32.1 S2.3 S2.4
N$36: J16.11 R34.1 S1.3 S1.4
N$37: LED2.3 R10.2
N$38: JP3.2 R12.1 R13.2
N$45: LED2.4 R11.2
N$58: IC13.3 IC14.7 R20.1
N$59: IC14.2 R18.2
N$63: IC13.1 IC15.1
N$65: IC14.4 R21.2
N$68: IC13.5 IC14.3
OUT1: J4.1 Q1.2
OUT2: J4.3 Q2.2
OUT3: J4.4 Q3.2
OUT4: J4.5 Q4.2
OUT5: J4.6 Q5.2
OUT6: J4.7 Q6.2
OUT7: J4.8 Q7.2
OUT8: J4.9 Q8.2
OUT9: J3.1 Q9.2
OUT10: J3.3 Q10.2
OUT11: J3.4 Q11.2
OUT12: J3.5 Q12.2
OUTCTL1: IC1.2 J15.11
OUTCTL2: IC1.4 J15.12
OUTCTL3: IC2.2 J15.19
OUTCTL4: IC2.4 J15.20
OUTCTL5: IC3.2 J18.20
OUTCTL6: IC3.4 J18.19
OUTCTL7: IC4.2 J18.17
OUTCTL8: IC4.4 J18.16
OUTCTL9: IC5.2 J18.12
OUTCTL10: IC5.4 J18.14
OUTCTL11: IC6.2 J18.15
OUTCTL12: IC6.4 J18.7
PLUNGER_ADC: J9.8 J16.7 JP3.5
PLUNGER_IRQ1_SCL: J9.6 J15.17
PLUNGER_IRQ2: J9.5 J15.14
PLUNGER_SDA: J9.1 J15.16
PSU2_STATUS_SENSE: IC14.5 J16.10 R22.2
PSU2_STATUS_SET: IC14.1 J16.9
SCL: J14.3 J15.10 J18.9 JP2.4 JP4.3 QWIIC1.4 R30.1
SDA: J14.5 J15.9 J18.10 JP2.5 JP4.4 QWIIC1.3 R29.1
UART0_RX: J12.3 J16.19
UART0_TX: J12.1 J16.20
VBUS: D1.2 J14.1 J16.1

## Tracks (layer width: path | path; a pad name or v marks a point on that pad's centre or on a via)
3V3_PERIPHERAL  (via drill 0.8, 1.25)
  Top 0.5: R29.2 59.05,8.85
  Top 0.75: v45.6,11.2 56.7,11.2 59.05,8.85 59.6,8.3 QWIIC1.2 | R29.2 R30.2
  Top 1: v93,57.1 v63,57.1
  Bottom 0.5: JP4.1 29.05,18.1 R12.2
  Bottom 0.75: JP4.1 37.55,15.95 42.1,11.4 45.4,11.4 v45.6,11.2 | JP1.6 50.35,48.45 48.5,46.6
  Bottom 1: v63,57.1 62.4,57.1 51.9,46.6 48.5,46.6 44.5,46.6 37.65,39.75 JP2.1 37.3,38.2 34.8,35.7 34.8,20.85 JP4.1 | v93,57.1 94.13,57.1 96.59,54.64 Q15.2
3V3_PICO  (via drill 0.55, 0.6, 1.25)
  Top 0.4: 59.6,12.7 59.2,12.7 v58.1,11.6
  Top 0.5: 97.9,13.7 100.4,16.2 105.5,16.2 v109.4,20.1 109.4,39.8 112.2,42.6 112.2,45.2 116.74,49.74 LED2.2
  Top 1: 41.4,12.7 59.6,12.7 J16.5 69,12.71 v72.7,9 | 41.4,12.7 37.56,12.7 R27.1 26.33,23.93 C19.2 | IC18.16 26.48,97.99 C9.2 26.6,97.73 C10.2 | IC16.16 26.52,77.69 C10.2 | IC12.16 26.18,57.39 C18.2 | IC11.16 26.18,36.99 C19.2 | C10.2 27.13,77.77 28.7,76.2 28.7,74.6 26.33,72.23 C18.2 | C19.2 C18.2 | J10.1 97.9,13.7 97.9,20.3 93.6,24.6 v93.6,37.3 | J9.4 44.64,9.46 41.4,12.7
  Bottom 0.4: R34.2 59.4,19.09 57.8,17.49 57.8,11.9 v58.1,11.6
  Bottom 0.5: IC14.6 110.73,21.43 v109.4,20.1
  Bottom 1: R27.1 37.36,11.76 35.6,10 15.8,10 12.7,13.1 R23.1 11.96,21.04 10.6,22.4 10.6,53.4 11.47,54.27 11.47,54.44 | R25.1 11.34,77.64 10.5,76.8 10.5,55 11.06,54.44 11.47,54.44 | R24.1 11.47,54.44 | J10.1 97.9,8.1 97,9 v72.7,9 | Q15.1 93.6,52.84 93.6,52.1 95.3,50.4 95.3,45.7 | 95.3,45.7 95.3,39 v93.6,37.3 | R28.2 94.1,46.9 95.3,45.7
5V  (via drill 1.25)
  Top 0.4: IC13.14 97.98,31.62 100.52,29.08 IC13.2 100.52,26.32 99.57,25.37 IC15.2 | IC14.8 111.3,24.4 111.3,16.6 109.6,14.9 109.6,7.43 J11.1
  Top 0.5: C15.1 98.03,37.02 IC13.14
  Top 1: v154.5,86.8 154.5,59.1 158.5,55.1 v158.5,52.5
  Bottom 0.4: IC13.4 105.6,29.7 | 105.6,29.7 104.8,30.5 101.42,30.5 100.52,29.6 IC13.2 | 105.6,29.7 105.6,29.8 106.3,30.5 108.6,30.5 109.4,29.7 109.4,28.3 111.19,26.51 IC14.8
  Bottom 1: J1.2 149.67,91.63 | v158.5,52.5 158.5,19.3 148.7,9.5 148.7,5 145,1.3 109.1,1.3 | J9.2 40.74,6.64 39.5,5.4 39.5,3 41.2,1.3 109.1,1.3 | J11.1 106.97,3.63 | 149.67,91.63 v154.5,86.8 | J11.1 106.97,3.43 109.1,1.3 | J11.1 110.7,4.8 111.47,4.03 C16.1 | 149.67,91.63 143.7,97.6 117.8,97.6 J2.6
12V
  Top 0.406: 41.27,68.1 C1.2 | 41.27,66.1 C2.2
  Top 0.5: 32.09,68.1 32,68.19 | 45.1,68.03 45,68.03 | 41.4,68.03 C1.2 | 49.17,68.86 50,68.03 | 58,68.03 58.4,68.03 | C6.2 C5.2 | 62.37,68.56 62.9,68.03
  Top 1: IC1.8 30.89,69.3 32,68.19 30.89,67.09 IC1.1 | 37,68.1 41.27,68.1 41.27,66.1 | 37,68.1 32.09,68.1 | C3.2 50,68.03 45.1,68.03 44.09,67.02 IC2.1 | 41.4,68.03 45,68.03 44.09,68.94 IC2.8 | IC1.6 35.97,69.13 37,68.1 | IC2.6 49.17,68.86 | C4.2 C3.2 | C3.2 58,68.03 57.29,68.74 IC3.8 | 71.4,68.03 C5.2 62.9,68.03 58.4,68.03 57.29,66.92 IC3.1 | 71.4,68.03 76.5,68.03 | 76.5,68.03 C8.2 | C7.2 C8.2 | IC4.6 75.57,68.96 76.5,68.03 | IC4.8 70.49,68.94 71.4,68.03 | IC3.6 62.37,68.56 | IC4.1 70.49,67.12 71.4,68.03 | C8.2 84.5,68.03 | 84.5,68.03 84.8,68.03 | 84.8,68.03 90.1,68.03 | 90.1,68.03 C11.2 | C11.2 C12.2 | IC5.6 88.77,69.36 90.1,68.03 | IC5.8 83.69,68.84 84.5,68.03 | IC5.1 83.69,66.92 84.8,68.03 | C11.2 97.7,68.03 | 97.7,68.03 98.3,68.03 | 98.3,68.03 102.9,68.03 | 102.9,68.03 C13.2 C14.2 | IC6.8 96.89,68.84 97.7,68.03 | IC6.6 101.97,68.96 102.9,68.03 | IC6.1 96.89,66.62 98.3,68.03
  Bottom 1: C13.2 107.93,68.03 109.3,69.4 109.3,82.8 112.14,85.64 J2.5
$N377  (via drill 0.5)
  Top 0.5: R19.2 101.11,13.59 101.7,13 104.9,13 v105.7,13.8 Q13.2
  Bottom 0.5: v105.7,13.8 105.7,13.7 106.5,12.9 108.7,12.9 109.9,11.7 D3.A
/PERIPHERAL_POWER_ENABLE
  Top 0.5: R28.1 98.8,46.9 96.4,44.5 R33.1 89.3,40.91 89.3,19.6 87.48,17.78 J15.7
  Bottom 0.4: 147.96,37.44 147.95,37.45
  Bottom 0.5: R26.1 R28.1 113.5,46.9 115,45.4 115,43.8 116.1,42.7 123.8,42.7 132.1,34.4 144.9,34.4 147.95,37.45 | J14.7 147.96,37.44
ACCEL_INTR
  Top 0.5: JP2.6 57.15,31.4 64.2,31.4 65.12,30.48 J16.12
ADC_INTR  (via drill 0.55)
  Top 0.5: v79.3,38.12 J15.15
  Bottom 0.5: JP4.6 54.8,22.65 54.8,35.6 57.3,38.1 v79.3,38.12
BUTTON1
  Top 0.4: J8.1 R27.2 34.7,12.9 32.6,15 30.3,15 29.3,16 28.3,16 26.8,17.5 23.7,17.5 22.6,18.6 22.6,23.5 23.39,24.29 IC11.11
BUTTON2
  Top 0.4: J8.2 R27.3 31.08,14.1 30,14.1 28.9,15.2 27.9,15.2 26.5,16.6 23.5,16.6 21.9,18.2 21.9,25.3 23.43,26.83 IC11.12
BUTTON3
  Top 0.4: J8.4 27.21,7.01 29.74,9.54 R27.4 28.34,14.3 27.6,14.3 26,15.9 23,15.9 21.2,17.7 21.2,27.5 23.07,29.37 IC11.13
BUTTON4
  Top 0.4: J8.5 24.67,7.57 27.2,10.1 R27.5 27.1,12.9 24.9,15.1 24.1,15.1 23.8,15.1 22.7,15.1 20.5,17.3 20.5,29.8 22.61,31.91 IC11.14
BUTTON5  (via drill 0.55)
  Top 0.4: J8.6 22.13,7.83 24.66,10.36 R27.6 23.36,14.2 22.3,14.2 19.7,16.8 v19.7,23.8
  Bottom 0.4: IC11.6 19.21,24.29 v19.7,23.8
BUTTON6  (via drill 0.55)
  Top 0.4: J8.7 19.59,7.99 22.12,10.52 R27.7 18.9,16.12 18.9,25 19.1,25.2 v19.1,25.7
  Bottom 0.4: IC11.5 17.97,26.83 v19.1,25.7
BUTTON7  (via drill 0.55)
  Top 0.4: J8.8 17.05,8.15 19.58,10.68 R27.8 18.7,13.78 18.7,13.8 18.2,14.3 18.2,26.5 18.4,26.8 v18.4,27.6
  Bottom 0.4: v18.4,27.6 18.4,28.6 17.63,29.37 IC11.4
BUTTON8
  Top 0.4: J8.9 14.51,8.11 17.04,10.64 R27.9 17.04,17.94 17.5,18.4 17.5,31.4 16.99,31.91 IC11.3
BUTTON9  (via drill 0.45)
  Top 0.4: J7.1 5.87,11.97 7.6,13.7 7.6,21.9 9.28,23.58 R23.2 | v19.4,31.7 20.8,33.1 20.8,43.2 22.29,44.69 IC12.11
  Bottom 0.4: R23.2 13.78,23.58 15.1,24.9 15.1,30.2 15.6,30.7 18.4,30.7 v19.4,31.7
BUTTON10  (via drill 0.45)
  Top 0.4: J7.2 4.41,14.51 6.9,17 6.9,22.4 10.62,26.12 R23.3 | v19.2,33.6 19.9,34.3 19.9,45 22.13,47.23 IC12.12
  Bottom 0.4: R23.3 13.12,26.12 14.4,27.4 14.4,32.2 15.4,33.2 18.8,33.2 v19.2,33.6
BUTTON11
  Top 0.4: J7.3 5.35,17.05 6.2,17.9 6.2,22.8 12.06,28.66 R23.4 12.76,28.66 14.8,30.7 14.8,32.6 15.4,33.2 17.1,33.2 19.2,35.3 19.2,47.3 21.67,49.77 IC12.13
BUTTON12
  Top 0.4: J7.5 4.43,22.13 11,28.7 11,30.3 11.9,31.2 R23.5 12.7,31.4 14.1,32.8 14.1,34.9 14.9,35.7 17.1,35.7 18.5,37.1 18.5,49.1 21.71,52.31 IC12.14
BUTTON13
  Top 0.4: J7.6 4.97,24.67 9.9,29.6 9.9,31.6 12.04,33.74 R23.6
  Bottom 0.4: R23.6 13.04,33.74 14,34.7 14,42.46 IC12.6
BUTTON14
  Top 0.4: J7.7 4.61,27.21 8.9,31.5 8.9,33.5 11.68,36.28 R23.7 12.98,36.28 14.9,38.2 14.9,45.9 IC12.5
BUTTON15
  Top 0.4: 4.2,29.9 J7.8 7.7,33.25 7.7,34 12.52,38.82 R23.8 12.72,38.82 14.1,40.2 14.1,48.3 15.57,49.77 IC12.4
BUTTON16
  Top 0.4: J7.9 11.1,39.19 11.1,40.2 12.26,41.36 R23.9 12.7,50.9 14.11,52.31 IC12.3
BUTTON17
  Top 0.4: IC16.11 23.69,64.99 21.5,62.8 21.5,59.1 18.5,56.1 14.8,56.1 13.92,56.98 R24.2 11.4,55.68 11.4,44.9 4.87,38.37 J6.1
BUTTON18
  Top 0.4: J6.2 6.21,40.91 10.6,45.3 10.6,58.7 11.42,59.52 R24.3 14.38,59.52 15.3,58.6 17.7,58.6 20.7,61.6 20.7,64.06 IC16.12
BUTTON19
  Top 0.4: J6.3 6.45,43.45 9.7,46.7 9.7,60.1 11.66,62.06 R24.4 14.44,62.06 15.4,61.1 17.3,61.1 19.8,63.6 19.8,65.7 IC16.13
BUTTON20
  Top 0.4: J6.4 5.39,45.99 8.9,49.5 8.9,62.8 10.7,64.6 R24.5 14.5,64.6 15.5,63.6 17.6,63.6 18.9,64.9 18.9,67.34 IC16.14
BUTTON21
  Top 0.4: J6.6 4.67,51.07 8.2,54.6 8.2,65.3 10.04,67.14 R24.6 14.08,67.14 IC16.6
BUTTON22
  Top 0.4: J6.7 4.81,53.61 7.5,56.3 7.5,67.4 9.78,69.68 R24.7 14.08,69.68 IC16.5
BUTTON23
  Top 0.4: J6.8 4.95,56.15 6.8,58 6.8,70.5 8.52,72.22 R24.8 14.08,72.22 IC16.4
BUTTON24
  Top 0.4: J6.9 4.99,58.69 6.1,59.8 6.1,71.8 9.06,74.76 R24.9 14.08,74.76 IC16.3
BUTTON25
  Top 0.4: R25.2 14.18,80.18 15.4,81.4 18.8,81.4 22.69,85.29 IC18.11
  Bottom 0.4: J5.1 5.47,64.77 8.1,67.4 8.1,78.4 9.4,79.7 9.7,80 9.88,80.18 R25.2
BUTTON26
  Top 0.4: R25.3 13.92,82.72 15.2,84 18.8,84 22.63,87.83 IC18.12
  Bottom 0.4: J5.2 4.71,67.31 7.4,70 7.4,80.2 9.92,82.72 R25.3
BUTTON27
  Top 0.4: R25.4 13.76,85.26 15,86.5 18.5,86.5 22.37,90.37 IC18.13
  Bottom 0.4: J5.3 4.55,69.85 6.6,71.9 6.6,80.9 10.96,85.26 R25.4
BUTTON28
  Top 0.4: R25.5 13.6,87.8 15,89.2 18.2,89.2 21.91,92.91 IC18.14
  Bottom 0.4: J5.4 4.89,72.39 5.9,73.4 5.9,83.3 10.4,87.8 R25.5
BUTTON29
  Top 0.4: J5.5 5.53,74.93 6.7,76.1 6.7,80.6 10.1,84 13.7,84 14.99,85.29 IC18.6
  Bottom 0.4: R25.6 12.7,90.1 14.8,88 14.8,86.72 IC18.6
BUTTON30
  Top 0.4: J5.7 4.61,80.01 11.1,86.5 13.8,86.5 15.13,87.83 IC18.5
  Bottom 0.4: R25.7 12.7,92.7 14.9,90.5 14.9,89.16 IC18.5
BUTTON31
  Top 0.4: J5.8 4.2,82.7 11.3,89.8 11.3,94.02 R25.8
  Bottom 0.4: R25.8 12.7,95.3 14.7,93.3 14.7,91.9 IC18.4
BUTTON32
  Top 0.4: J5.9 4.69,85.09 10.5,90.9 10.5,95.76 R25.9
  Bottom 0.4: R25.9 13.64,97.96 14.7,96.9 14.7,94.44 IC18.3
BUTTON_CLK  (via drill 0.55)
  Top 0.5: v30.3,42.3 30.4,42.2 62,42.2 63.56,40.64 J16.16
  Bottom 0.5: IC18.2 16.85,95.45 18.2,94.1 18.2,79.9 17.3,79 15.4,79 14.7,78.3 14.7,75.9 15.45,75.15 IC16.2 17.55,75.15 18.4,74.3 18.4,59.8 17.3,58.7 15.3,58.7 14.7,58.1 14.7,55.5 15.35,54.85 IC12.2 17.15,54.85 18.2,53.8 18.2,39.2 17.4,38.4 15.4,38.4 14.8,37.8 14.8,36.2 15.6,35.4 16,35.4 16.23,35.17 IC11.2 17.35,34.45 20.3,37.4 20.3,38.9 22.3,40.9 28,40.9 29.4,42.3 v30.3,42.3
BUTTON_DATA  (via drill 0.55)
  Top 0.5: v38.5,43.5 65,43.5 65.32,43.18 65.33,43.19 J16.17
  Bottom 0.5: v38.5,43.5 32.6,37.6 32.6,25.7 26.11,19.21 IC11.9
BUTTON_SHLD  (via drill 0.55)
  Top 0.5: v28.1,42.7 29.6,41.2 60.1,41.2 63.2,38.1 J16.15
  Bottom 0.5: IC11.1 17.89,36.99 19.2,38.3 19.2,41.4 | 19.2,41.4 19.2,55.6 17.5,57.3 | 17.5,57.3 17.41,57.39 IC12.1 | 17.5,57.3 17.5,57.5 19.4,59.4 19.4,76.1 17.9,77.6 | 17.9,77.6 17.81,77.69 IC16.1 | 17.9,77.6 17.9,77.7 19.3,79.1 19.3,94.92 IC18.1 | 19.2,41.4 21.2,43.4 27.4,43.4 v28.1,42.7
FLASHCTL1  (via drill 0.45)
  Top 0.4: IC7.1 IC7.2 | J17.20 135.07,50.93 v134.9,51.1
  Bottom 0.4: IC7.2 114.58,78.62 117.3,75.9 117.3,60.4 118.4,59.3 121.3,59.3 124.7,55.9 130.1,55.9 v134.9,51.1
FLASHCTL2  (via drill 0.45)
  Top 0.4: IC7.3 IC7.4 | J17.19 135.31,48.39 v135.1,48.6
  Bottom 0.4: IC7.4 114.26,73.54 116.6,71.2 116.6,60.1 118.3,58.4 120.7,58.4 124.6,54.5 129.2,54.5 v135.1,48.6
FLASHCTL3  (via drill 0.45)
  Top 0.4: IC7.5 IC7.6 | v134.9,43.3 J17.17
  Bottom 0.4: IC7.6 113.94,68.46 115.8,66.6 115.8,60 118.2,57.6 120.3,57.6 134.6,43.3 v134.9,43.3
FLASHCTL4  (via drill 0.45)
  Top 0.4: IC7.7 IC7.8 | v136.1,40.8 145.12,40.8 J17.16
  Bottom 0.4: IC7.8 113.82,63.38 115.1,62.1 115.1,59.7 117.9,56.9 119.9,56.9 136,40.8 v136.1,40.8
FLASHCTL5  (via drill 0.45)
  Top 0.4: IC8.1 IC8.2 | v138.1,39.3 138.1,39.2 139.07,38.23 J17.15
  Bottom 0.4: IC8.2 124.32,78.52 121.5,75.7 121.5,60.2 125,56.7 131.1,56.7 138.1,49.7 v138.1,39.3
FLASHCTL6  (via drill 0.45)
  Top 0.4: IC8.3 IC8.4 | v139.8,36.6 140.71,35.69 J17.14
  Bottom 0.4: IC8.4 123.74,73.44 122.4,72.1 122.4,60.5 125.3,57.6 132,57.6 139.8,49.8 v139.8,36.6
FLASHCTL7
  Top 0.4: IC8.5 IC8.6 123.66,68.36 122.7,67.4 122.7,60.2 123.6,59.3 129.1,59.3 130.4,58 138.7,58 142.3,54.4 144.2,54.4 146.5,52.1 146.5,31.4 145.71,30.61 J17.12
FLASHCTL8
  Top 0.4: IC8.7 IC8.8 126.22,63.28 130.5,59 138.8,59 142.6,55.2 144.5,55.2 147.2,52.5 147.2,29.2 146.07,28.07 J17.11
FLASHCTL9
  Top 0.4: IC10.7 IC10.8 138.82,63.28 139.8,62.3 139.8,59.1 142.9,56 144.7,56 148,52.7 148,27.5 146.03,25.53 J17.10
FLASHCTL10
  Top 0.4: IC10.5 IC10.6 138.64,68.36 140.5,66.5 140.5,59.7 143.4,56.8 145,56.8 148.7,53.1 148.7,25 146.69,22.99 J17.9
FLASHCTL11
  Top 0.4: IC10.3 IC10.4 138.86,73.44 141.3,71 141.3,60 143.6,57.7 145.2,57.7 149.5,53.4 149.5,43.5 151.8,41.2 151.8,19.9 149.81,17.91 J17.7
FLASHCTL12
  Top 0.4: IC10.1 IC10.2 139.78,78.52 142.1,76.2 142.1,60.2 143.8,58.5 145.4,58.5 150.3,53.6 150.3,43.9 152.5,41.7 152.5,19.4 148.47,15.37 J17.6
FLASHCTL13
  Top 0.4: IC9.5 IC9.6 149.43,68.3 150.5,68.3 151.3,67.5 151.3,59 151,58.7 151,44.5 153.3,42.2 153.3,18 148.13,12.83 J17.5
FLASHCTL14
  Top 0.4: IC9.3 IC9.4 149.43,73.3 150.5,73.3 152,71.8 152,58.6 151.8,58.4 151.8,44.9 154.1,42.6 154.1,16.1 148.29,10.29 J17.4
FLASHCTL15
  Top 0.4: IC9.1 IC9.2 150.98,78.42 152.7,76.7 152.7,58.2 152.6,58.1 152.6,45.4 154.9,43.1 154.9,15.3 147.5,7.9 147.5,7.1 145.61,5.21 J17.2
FLASHCTL16  (via drill 0.45)
  Top 0.4: v153.4,56.8 153.3,56.7 153.3,45.8 155.8,43.3 155.8,14.3 148.8,7.3 148.8,4.5 146.97,2.67 J17.1
  Bottom 0.4: v153.4,56.8 153.4,60.4 150.62,63.18 IC9.8 IC9.7
FLASHER1
  Top 1: IC7.18 | IC7.17 IC7.18 | J1.15 124.07,94.17 123.4,93.5 123.4,85.05 IC7.18
FLASHER2
  Top 1: IC7.15 IC7.16 119.49,76.1 118.1,76.1 116.9,77.3 116.9,81.9 121.9,86.9 121.9,94.3 123.7,96.1 126.5,96.1 127.75,94.85 J1.13
FLASHER3
  Top 1: IC7.13 IC7.14 117.4,71 115.5,72.9 115.5,82.7 120.4,87.6 120.4,94.9 123,97.5 128.3,97.5 130.29,95.51 J1.11
FLASHER4
  Top 1: IC7.11 IC7.12 117.68,65.92 114.1,69.5 114.1,83.7 118.9,88.5 118.9,95.5 122.3,98.9 130.2,98.9 132.83,96.27 J1.9
FLASHER5
  Top 1: IC8.17 IC8.18 | IC8.18 132.56,81.06 | IC8.18 135.55,84.1 145.7,84.1 149.4,87.8 149.4,96.1 146.5,99 137.6,99 135.37,96.77 J1.7
FLASHER6
  Top 1: IC8.15 IC8.16 130.82,75.98 130,76.8 130,82.2 133.2,85.4 144.9,85.4 148.1,88.6 148.1,95.4 145.9,97.6 139.6,97.6 137.91,95.91 J1.5
FLASHER7
  Top 1: IC8.13 IC8.14 130.1,70.9 128.6,72.4 128.6,83.2 132.1,86.7 144,86.7 146.6,89.3 146.6,94.7 145.2,96.1 141.3,96.1 140.45,95.25 J1.3
FLASHER8
  Top 1: IC8.11 132.51,65.3 | 132.51,65.3 IC8.12 | 132.51,65.3 129.9,65.3 127.2,68 127.2,84.4 130.8,88 143.1,88 145.2,90.1 145.2,93.3 144.33,94.17 J1.1
FLASHER9
  Bottom 1: IC10.11 IC10.12 | IC10.11 144.88,63.28 | IC10.11 143.38,63.28 138.9,58.8 130.2,58.8 129,60 129,84.3 125.21,88.09 J1.16
FLASHER10
  Bottom 1: IC10.13 IC10.14 143.1,70.9 140.9,73.1 140.9,81.6 140,82.5 135.3,82.5 127.75,90.05 J1.14
FLASHER11
  Bottom 1: IC10.15 IC10.16 143.12,75.98 142.2,76.9 142.2,82.6 141,83.8 136.3,83.8 130.29,89.81 J1.12
FLASHER12
  Bottom 1: IC10.17 IC10.18 144.81,83.89 143.3,85.4 137.2,85.32 132.83,89.69 J1.10
FLASHER13
  Bottom 1: IC9.13 IC9.14 155.6,70.8 152.8,73.6 152.8,81.2 147.2,86.8 138.4,86.8 135.37,89.83 J1.8
FLASHER14
  Bottom 1: IC9.15 IC9.16 155.62,75.88 154.4,77.1 154.4,81.8 147.9,88.3 139.7,88.3 137.91,90.09 J1.6
FLASHER15
  Bottom 1: IC9.17 IC9.18 157.01,81.49 148.7,89.8 141.4,89.8 140.45,90.75 J1.4
FLASHER16
  Bottom 1: IC9.12 IC9.11 155.88,63.18 154.7,62 154.7,53.9 J13.1
GND  (via drill 0.5, 0.55)
  Top 1: IC7.9 110.26,60.84 | IC8.9 126.46,60.74 | IC9.9 147.74,60.64 | IC10.9 135.64,60.74
  Top 1.5: J2.1 96.3,98 | J2.2 100.26,93.84 | J2.3 104.22,93.72 | J2.4 108.2,93.6
  Bottom 1: IC7.9 110.26,60.84 | IC8.9 126.36,60.74 | IC10.9 135.56,60.74 | IC9.9 147.64,60.64
  Bottom 1.5: J2.1 96.3,93.7 | J2.2 100.26,93.64 | J2.3 104.22,93.68 | J2.4 108.18,93.62 | J13.2 155.7,46.7
  other vias: 34.3,77.7 41,77.7 47.8,77.7 61.1,77.8 74.8,77.7 112.8,15.9 88.8,77.8 68.1,77.8 81.8,77.8 134.9,64.6 136.6,42.1 135,44.7 141.8,39.5 129.5,27 129.4,24.4 132.9,27 133,24.4 128.8,33.1 132.8,29.9 95.6,29.4 106.3,43.8 73.63,49.25 88.3,48.4 98.6,44.4 77.53,44.9
  pour Top: 0.4,99.8 160.1,99.8 160.1,-0.2 0.2,-0.2 0.2,99.8
  pour Bottom: 0.2,99.8 160,99.7 160,0.2 0.2,0.2
IR_IN  (via drill 0.6)
  Top 0.5: v88.1,15.4 86.1,15.4 | 86.1,15.4 85.73,15.4 | J10.3 95.36,15.36 v95.4,15.4 | J15.6 86.25,15.24 86.1,15.4
  Bottom 0.5: v88.1,15.4 88.9,15.4 89.4,15.9 94.9,15.9 v95.4,15.4
IR_LED_CATHODE
  Top 1: Q13.1 108.3,11.9 104.43,8.03 J11.2
IR_OUT
  Top 0.5: J15.1 88.28,2.54 93.49,7.75 R19.1
LED_B
  Top 0.5: R10.1 103.2,51.8 104.4,50.6 104.4,49.2 102.8,47.6 102.8,42.5 101.7,41.4 93.6,41.4 91.3,39.1 91.3,13.86 87.61,10.16 J15.4
LED_G
  Top 0.5: R11.1 103.6,54 105.3,52.3 105.3,48.8 103.7,47.2 103.7,42 102.2,40.5 94,40.5 92.3,38.8 92.3,10.3 87.08,5.08 J15.2
LED_R
  Top 0.5: R9.1 101.9,48.81 101.9,43.1 101.2,42.4 93.2,42.4 90.4,39.6 90.4,15.2 87.9,12.7 87.89,12.71 J15.5
N$1
  Top 1: R1.1 31.4,73.1 IC1.7
N$2
  Top 1: R2.1 39.9,74.8 38.5,73.4 IC1.5
N$3
  Top 1: R1.2 34.2,73.1 31.24,76.06 Q1.1
N$4
  Top 1: R2.2 37.94,77.78 Q2.1
N$5
  Top 1: R3.1 44.6,73.1 IC2.7
N$6
  Top 1: IC2.5 51.71,73.27 R4.1
N$7
  Top 1: R3.2 47.2,73.1 44.54,75.66 Q3.1
N$8
  Top 1: R4.2 51.34,77.98 Q4.1
N$9
  Top 1: R5.1 57.9,73.1 IC3.7
N$10
  Top 1: IC3.5 64.91,73.27 R6.1
N$11
  Top 1: R5.2 60.2,73.1 58.14,75.16 Q5.1
N$12
  Top 1: Q6.1 64.94,78.28 R6.2
N$13
  Top 1: R7.1 71.1,73.2 IC4.7
N$14
  Top 1: IC4.5 78.11,73.37 R8.1
N$15
  Top 1: Q7.1 71.94,75.26 73.9,73.2 R7.2
N$16
  Top 1: R8.2 74.98,75 Q8.1
N$17
  Top 1: D1.1 121.6,15.6 121.6,6.71 123.1,5.21 J18.2
N$18
  Bottom 0.5: R9.2 110.6,49.6 111.1,49.1 117.6,49.1 118.77,50.27 LED2.1
N$19
  Top 1: R14.1 84.3,73.2 IC5.7
N$20
  Top 1: IC5.5 91.31,73.27 R15.1
N$21
  Bottom 0.5: IC11.10 22.75,21.75 21.8,22.7 21.8,38.2 23.21,39.61 IC12.9
N$22
  Top 0.5: IC12.10 24.55,42.15 25.3,42.9 25.3,53.1 24.8,53.6 23.4,53.6 22.5,54.5 22.5,58.9 23.51,59.91 IC16.9
N$23
  Bottom 0.5: IC16.10 22.95,62.45 21.6,63.8 21.6,79 22.81,80.21 IC18.9
N$24
  Top 0.5: Q15.3 99.64,52.24 96.7,49.3 R26.2
N$25
  Top 1: Q9.1 85.54,74.56 86.9,73.2 R14.2
N$26
  Top 1: R15.2 88.98,75 Q10.1
N$27
  Top 1: R16.1 97.5,73.2 IC6.7
N$28
  Top 1: IC6.5 104.51,73.27 R17.1
N$29
  Top 1: R16.2 100.4,73.2 99.24,74.46 Q11.1
N$30
  Top 1: R17.2 102.18,75 Q12.1
N$31
  Bottom 0.4: R33.2 103.7,44.5 106.4,41.8 109.7,41.8 110.94,43.04 Q16.2
N$32
  Top 0.5: D4.A 113.5,14.1 115.5,11.7 D3.C
N$33
  Bottom 1: Q13.3 103.1,13.6 105,11.7 108.4,11.7 110.9,9.2 R31.2
N$34
  Top 0.4: R32.2 114.9,39.11 114.9,34.7 117.8,31.8 117.8,29.1 118.9,28 118.9,26.1 121.5,23.5 121.5,19.3 122.3,18.5 122.3,17 122.7,16.6 122.7,13.3 123.17,12.83 J18.5
N$35
  Top 0.4: 120.3,28.07 J18.11
  Top 0.5: 120.3,28.07 119.3,29.07 119.3,29.1 119,29.4 119,35.8 116.74,38.06 S2.4 116.74,42.9 | S2.3 116.74,42.9 | Q16.3 115.94,43.7 116.74,42.9
  Bottom 0.5: R32.1 109.28,39.5 Q16.3
N$36
  Top 0.4: R34.1 61.32,26.71 S1.3 63.57,27.94 63.57,27.95 J16.11
  Bottom 0.4: S1.4 S1.3
N$37
  Top 0.5: R10.2 109.2,51.8 108.2,50.8 108.2,48.9 109.4,47.7 112.5,47.7 114.71,49.91 LED2.3
N$38
  Top 0.5: R12.1 28.6,25.55 R13.2 38.39,27.29 40.09,29.09 JP3.2
N$45
  Top 0.5: R11.2 111.23,54 112.42,52.81 LED2.4
N$58
  Bottom 0.4: IC13.3 104.29,27.8 108.5,27.8 112.33,23.97 IC14.7 114.8,23.97 117.3,26.47 R20.1
N$59
  Top 0.4: IC14.2 104.57,23.97 102.7,22.1 102.7,20.69 R18.2 102.21,20.51
N$63
  Top 0.5: IC15.1 97.17,28.41 IC13.1
N$65
  Top 0.4: R21.2 105.2,18.3 IC14.4
N$68
  Top 0.4: IC14.3 106.43,21.43 108.14,23.14 IC13.5
OUT1
  Top 2.5: Q1.2 33.6,81.3 34.5,82.2 34.5,94.74 J4.1
OUT2
  Top 2.5: Q2.2 40,81.4 41.2,82.6 41.2,89.4 43.68,91.88 J4.3
OUT3
  Top 2.5: Q3.2 46.9,81.3 47.9,82.3 47.9,93.35 J4.4
OUT4
  Top 2.5: Q4.2 53.6,81.3 54.8,82.5 54.8,85.4 53.4,86.8 52.6,86.8 51.61,87.79 J4.5
OUT5
  Top 2.5: Q5.2 60,81.3 61.5,82.8 61.5,85.6 60.3,86.8 57.8,86.8 55.57,89.03 J4.6
OUT6
  Top 2.5: Q6.2 67.1,81.3 68.4,82.6 68.4,85.8 67.1,87.1 64.3,87.1 59.53,91.87 J4.7
OUT7
  Top 2.5: Q7.2 74.2,81.3 75.2,82.3 75.2,85.2 73.8,86.6 71.9,86.6 68.4,90.1 67.1,90.1 63.49,93.71 J4.8
OUT8
  Top 2.5: Q8.2 81,81.3 82,82.3 82,85.6 80.7,87 77.5,87 74.9,89.6 73.1,89.6 67.46,95.24 J4.9
OUT9
  Top 2.5: Q9.2 88,81.3 88.9,82.2 88.9,85.1 87.5,86.5 85.2,86.5 81.6,90.1 79.1,90.1 75.58,93.62 J3.1
OUT10
  Top 2.5: Q10.2 95,81.3 95.9,82.2 95.9,85.3 94.7,86.5 91.4,86.5 88.4,89.5 86.6,89.5 83.5,92.6 J3.3
OUT11
  Top 2.5: Q11.2 101.8,81.3 102.4,81.9 102.4,82 102.7,82.3 102.7,85.4 101.4,86.7 98.6,86.7 95.9,89.4 92.6,89.4 89.85,92.15 89.6,92.4 87.47,94.53 J3.4
OUT12
  Top 2.5: Q12.2 108,81.3 109.3,82.6 109.3,86.6 106.3,89.6 99.9,89.6 97.2,92.3 93.8,92.3 91.43,94.67 J3.5
OUTCTL1  (via drill 0.5, 0.55)
  Top 0.5: IC1.2 33.43,62.17 36.8,58.8 51,58.8 57.3,52.5 v72,52.5 | J15.11 82.86,27.95 v81,29.8
  Bottom 0.5: v72,52.5 76,52.5 80.64,47.86 80.64,30.16 v81,29.8
OUTCTL2  (via drill 0.55)
  Top 0.5: v76.2,53.6 57.7,53.6 51.5,59.8 40.7,59.8 38.51,61.99 IC1.4 | J15.12 82.61,30.48 v82.5,30.6
  Bottom 0.5: v76.2,53.6 76.6,53.6 81.99,48.21 81.99,31.11 v82.5,30.6
OUTCTL3  (via drill 0.5)
  Top 0.5: v77.4,54.5 58.2,54.5 51.8,60.9 48.2,60.9 46.63,62.47 IC2.2 | J15.19 83.28,48.69 v81.44,50.52
  Bottom 0.5: v81.44,50.52 81.38,50.52 v77.4,54.5
OUTCTL4  (via drill 0.5)
  Top 0.5: v76.2,55.5 58.8,55.5 51.71,62.59 IC2.4 | v83.5,52.1 84.8,50.8 84.81,50.8 J15.20
  Bottom 0.5: v76.2,55.5 80.1,55.5 v83.5,52.1
OUTCTL5
  Top 0.5: IC3.2 59.83,62.67 63.4,59.1 94.7,59.1 97.1,56.7 119.1,56.7 124.87,50.93 J18.20
OUTCTL6
  Top 0.5: IC3.4 64.91,61.99 67,59.9 95.1,59.9 97.4,57.6 119.7,57.6 124,53.3 128.7,53.3 130,52 130,49.5 128.89,48.39 J18.19
OUTCTL7
  Top 0.5: IC4.2 73.03,62.37 74.7,60.7 95.5,60.7 97.7,58.5 120.2,58.5 124.5,54.2 129.4,54.2 131,52.6 131,46.2 128.11,43.31 J18.17
OUTCTL8
  Top 0.4: J18.16 127.33,40.77 127.3,40.8
  Top 0.5: IC4.4 78.11,62.69 79.3,61.5 96,61.5 98.2,59.3 120.7,59.3 125,55 130,55 131.9,53.1 131.9,45.4 127.3,40.8 127.27,40.77
OUTCTL9  (via drill 0.55)
  Top 0.5: v122.4,31.7 122.4,31.6 123.39,30.61 J18.12
  Bottom 0.5: IC5.2 86.23,61.67 90.6,57.3 90.6,35.9 92.7,33.8 115.6,33.8 116.6,32.8 121.3,32.8 v122.4,31.7
OUTCTL10  (via drill 0.6)
  Top 0.5: v122.4,35.7 v122.41,35.69 J18.14
  Bottom 0.5: v122.39,35.69 v122.4,35.7 119.5,35.7 119.1,36.1 115.3,36.1 114.1,34.9 92.9,34.9 91.5,36.3 91.5,62.94 IC5.4
OUTCTL11  (via drill 0.55)
  Top 0.5: v129.3,41 129.3,40 127.7,38.4 127.53,38.23 J18.15
  Bottom 0.5: IC6.2 99.43,62.37 105,56.8 115.4,56.8 117.1,55.1 119,55.1 129.3,44.8 v129.3,41
OUTCTL12  (via drill 0.55)
  Top 0.5: v131.3,41.6 131.3,21.8 127.41,17.91 J18.7
  Bottom 0.5: IC6.4 104.51,61.59 108.3,57.8 115.8,57.8 117.5,56.1 119.3,56.1 131.3,44.1 v131.3,41.6
PLUNGER_ADC  (via drill 0.6)
  Top 0.4: 59.88,17.78 58.08,17.78
  Top 0.5: JP3.5 47.71,25.29 55.22,17.78 59.88,17.78 J16.7 | 58.08,17.78 v56.4,16.1
  Bottom 0.5: J9.8 49.72,9.42 v56.4,16.1
PLUNGER_IRQ1_SCL  (via drill 0.45)
  Top 0.4: J15.17 79.58,43.19 76.7,40.3 76.7,20.9 v76.4,20.6
  Bottom 0.4: J9.6 47.18,9.48 58.3,20.6 v76.4,20.6
PLUNGER_IRQ2  (via drill 0.6)
  Top 0.5: v75.4,4.7 76.9,6.2 76.9,17.3 79.6,20 79.6,34.1 81.06,35.56 J15.14
  Bottom 0.5: v75.4,4.7 73,2.3 48.2,2.4 47.18,3.42 J9.5
PLUNGER_SDA  (via drill 0.45, 0.5)
  Top 0.4: J9.1 41.1,4.1 40.3,4.9 40.3,7.5 v41.5,8.7 | J15.16 79.75,40.65 78.2,39.1 78.2,23.16 v78.17,23.13
  Bottom 0.4: v41.5,8.7 42.6,9.8 45.6,9.8 57.8,22 76.98,22.02 77.06,22.02 v78.17,23.13
PSU2_STATUS_SENSE  (via drill 0.45, 0.55)
  Top 0.4: 116,23.7 116,31.6 v114.7,32.9 | 116,23.7 116,20.32 115.57,19.89 | 115.57,19.89 115.57,19.83 | IC14.5 114.57,18.89 115.57,19.89 | R22.2 116.81,24.51 116,23.7 | J16.10 69.61,25.41 v70.7,26.5
  Bottom 0.4: v114.7,32.9 93.5,32.9 88.8,28.2 72.4,28.2 v70.7,26.5
PSU2_STATUS_SET  (via drill 0.45)
  Top 0.4: v73.4,26.6 69.66,22.86 J16.9
  Bottom 0.4: v73.4,26.6 90.8,26.6 91.6,27.4 102.8,27.4 103.69,26.51 IC14.1
SCL  (via drill 0.45)
  Top 0.4: JP2.4 45.27,34.67 43.9,33.3 43.9,22.7 42.7,21.5 42.7,18.17 JP4.3 42.63,16.37 45,14 v62.7,14 61.8,14.9 R30.1 | v127.6,23 v127.59,22.99 J18.9 124.05,22.55 v122.69,21.19 | QWIIC1.4 61.6,6.5 v62.4,7.3 | v80.7,11.4 80.7,23.87 82.23,25.41 J15.10
  Bottom 0.4: v127.6,23 144.42,23 148.7,27.28 J14.3 | 66.2,10.5 79.8,10.5 | 79.8,10.5 108,10.5 110.8,7.7 114.4,7.7 115.4,9.1 115.4,13 119,16.2 119,19.2 120.99,21.19 v122.69,21.19 | 79.8,10.5 v80.7,11.4 | 66.2,10.5 v62.7,14 | 66.2,10.5 65.6,10.5 v62.4,7.3
SDA  (via drill 0.45, 0.5)
  Top 0.4: JP2.5 47.81,34.91 46.45,33.55 46.45,21.55 45.17,20.27 JP4.4 45.17,16.53 46.8,14.9 v59.7,14.9 59.2,15.4 R29.1 | QWIIC1.3 60.6,7.3 v60.5,7.4 | v129.7,25.5 127.38,25.5 J18.10 v120.73,25.53 | J15.9 83.28,20.57 v82.56,19.85
  Bottom 0.4: JP4.4 45.17,16.77 | v129.7,25.5 140.6,25.5 147.46,32.36 | 147.46,32.36 147.47,32.37 | v120.73,25.53 119.2,24 119.2,21.2 115,17 79.73,16.98 80.32,17.58 | 80.32,17.58 v82.56,19.85 | v60.5,7.4 60.5,14.1 v59.7,14.9 63.1,14.9 65.2,17 79.74,17 80.32,17.58 | J14.5 147.46,32.36
UART0_RX
  Top 0.4: J12.3 62.26,45.16 65.36,48.26
  Top 0.5: 65.36,48.26 J16.19
UART0_TX
  Top 0.4: J12.1 61.66,50.8 J16.20
VBUS
  Top 1: D1.2 120.6,35.9 119.1,37.4 119.1,48.1 121.2,50.2 121.2,52.7 118.4,55.5 84,55.5 74.9,46.4 74.9,7.4 70.05,2.54 J16.1
  Bottom 1: D1.2 120.6,27.7 127.5,20.8 144.9,20.8 146.3,22.2 J14.1

## Text on the board
tPlace: UART | TX | GND | RX | LIS3DH / Module | RESET | RESET | ADS1115 / Module
tNames: FLASHERS | 1 | X | 2 | 3 | 4 | 5 | 6 | 7 | 8 | 9 | X | 10 | 11 | 12 | GND | GND | GND | GND | 12V | 5V | HIGH POWER OUTPUTS 1-8 | HI PWR 9-12 | 2ND PSU | BUTTONS 25-32 | PINSCAPE PICO | DIY MAIN BOARD REV 20250201 | + | MAIN PICO | PWMWORKER 0 | GND/STROBE | + | BUTTONS 17-24 | TO POWER BOARD | BUTTONS 9-16 | PLUNGER | IR-RX | IR-TX | BUTTONS 1-8 | QWIIC